# EAGLE board Castle_2_3_2_082224 (EAGLE 9.3.0)
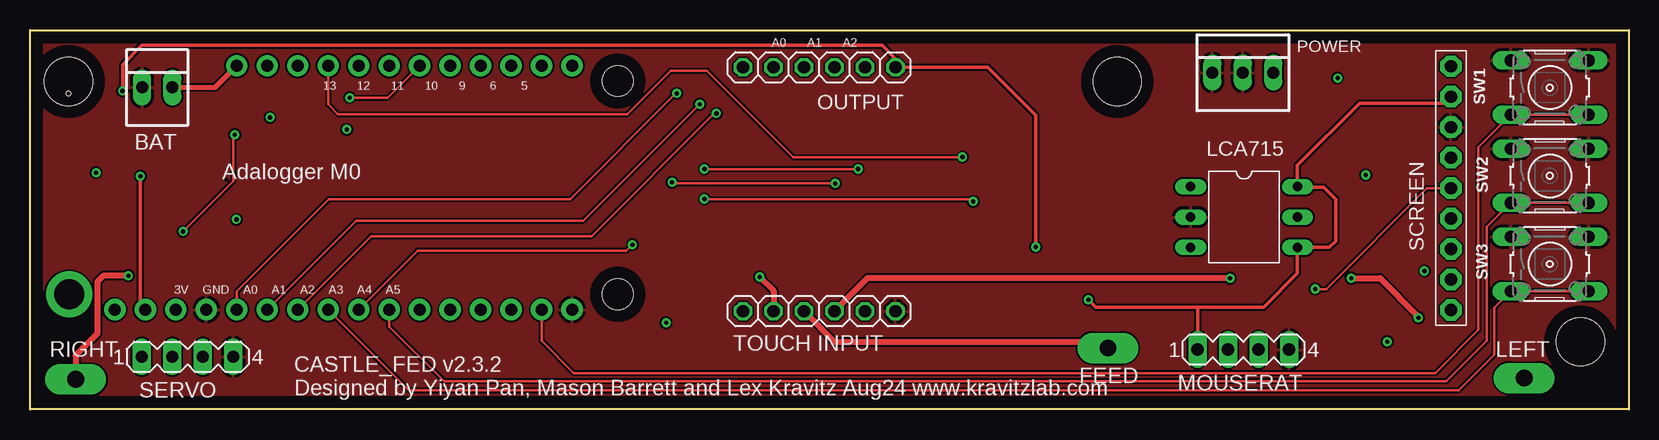
[diagram p0: board, top side]
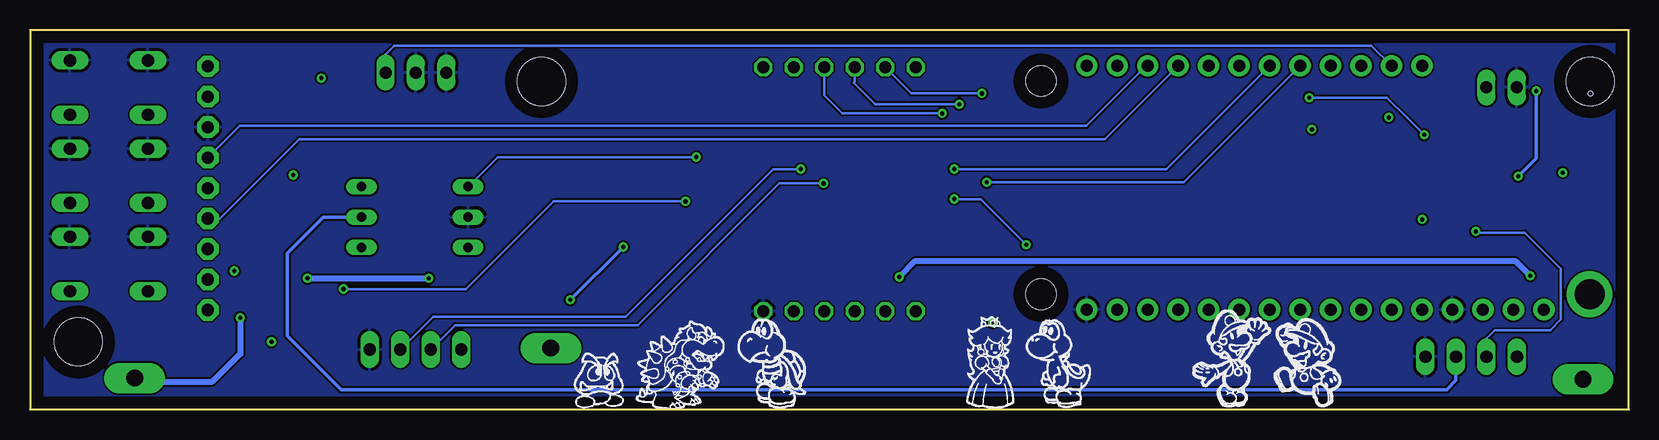
[diagram p1: board, bottom side, seen from below]

Size 133.23 x 31.61 mm. Coordinates in mm from the lower left corner, seen from the top.
Outline: 0,31.61 133.23,31.61 133.23,0 0,0 0,31.61
Copper layers (1*16): Top 0.035mm / dielectric 1.5mm / Bottom 0.035mm
Design rules "default": minimum track width 6mil, minimum drill 0.35mm, track to track 6mil, track to pad 6mil, pad to pad 6mil, via to via 6mil, smd to smd 6mil, copper to edge 40mil, drill to drill 6mil, minimum pad ring 10mil, minimum via ring 8mil, stop-mask expansion 4mil, vias tented up to drill 0mil, thermal gap 10mil
Holes 4 mm at 3.2,27.33 90.6,27.33 129.2,5.63
Holes 0.35 mm at 3.2,26.3

## Footprints (pad centres in the part's own frame; a part is rotated, then mirrored left to right if it is on the bottom)
1X1-BIGPOGO = drill 1.4 pad 2.54 long: P$1 0,0
LCA7XX = drill 0.8 long: P$1 -5.08,2.54; P$2 -5.08,0; P$3 -5.08,-2.54; P$4 3.81,-2.54; P$5 3.81,0; P$6 3.81,2.54
MA04-1 = drill 1.016 long: 1 -3.81,0; 2 -1.27,0; 3 1.27,0; 4 3.81,0
FEATHERWING_DIM = drill 1 pad 1.778: 1 6.35,1.27; 2 8.89,1.27; 3 11.43,1.27; 4 13.97,1.27; 5 16.51,1.27; 6 19.05,1.27; 7 21.59,1.27; 8 24.13,1.27; 9 26.67,1.27; 10 29.21,1.27; 11 31.75,1.27; 12 34.29,1.27; 13 36.83,1.27; 14 39.37,1.27; 15 41.91,1.27; 16 44.45,1.27; 17 44.45,21.59; 18 41.91,21.59; 19 39.37,21.59; 20 36.83,21.59; 21 34.29,21.59; 22 31.75,21.59; 23 29.21,21.59; 24 26.67,21.59; 25 24.13,21.59; 26 21.59,21.59; 27 19.05,21.59; 28 16.51,21.59 | drill 2.5 pad 3.81: P$1 2.54,20.32; P$2 2.54,2.54 | hole 2.54: 48.26,20.32; 48.26,2.54
1X06 = drill 1.016 octagon: 1 -6.35,0; 2 -3.81,0; 3 -1.27,0; 4 1.27,0; 5 3.81,0; 6 6.35,0
22-23-2031 = drill 1 long: 1 -2.54,0; 2 0,0; 3 2.54,0
1X09-BIG = drill 1.016 pad 1.778 octagon: 1 -10.16,0; 2 -7.62,0; 3 -5.08,0; 4 -2.54,0; 5 0,0; 6 2.54,0; 7 5.08,0; 8 7.62,0; 9 10.16,0
B3F-10XX = drill 1.016 long: 1 -3.251,2.261; 2 3.251,2.261; 3 -3.251,-2.261; 4 3.251,-2.261
22-23-2021 = drill 1 long: 1 -1.27,0; 2 1.27,0

## Placement (x,y rotation side)
EXTRAGND  [1X1-BIGPOGO]  124.51,2.61 0 top
EXTRAGND1  [1X1-BIGPOGO]  89.83,5.11 0 top
EXTRAGND2  [1X1-BIGPOGO]  3.81,2.5 0 top
LCA715  LCA715S  [LCA7XX]  101.8,16.03 0 top
MOUSERAT  [MA04-1]  101.1,4.98 0 top
MS2  FEATHERWING_NODIM  [FEATHERWING_DIM]  0.72,7.04 0 top
OUTPUT  [1X06]  65.77,28.5 180 top
POWER  22-23-2031  [22-23-2031]  101.06,28.05 0 top
SCREEN  [1X09-BIG]  118.41,18.43 90 top
SERVO  [MA04-1]  13.13,4.38 0 top
SW1  [B3F-10XX]  126.65,26.81 0 top
SW2  [B3F-10XX]  126.65,19.46 0 top
SW3  [B3F-10XX]  126.65,12.11 0 top
TOUCH_INPUT  [1X06]  65.77,8.18 180 top
X1  22-23-2021  [22-23-2021]  10.6,26.83 0 top

## Library data of the parts
EXTRAGND EXTRAGND1 EXTRAGND2 MS2 OUTPUT SCREEN TOUCH_INPUT = adafruit
LCA715 = Mohamed's-library
MOUSERAT SERVO = con-lstb; OC_FARNELL: unknown; OC_NEWARK: unknown
POWER = con-molex; MF: MOLEX; MPN: 22-23-2031; OC_FARNELL: 1462950; OC_NEWARK: 30C0862
SW1-SW3 = buttons
X1 = con-molex; MF: MOLEX; MPN: 22-23-2021; OC_FARNELL: 1462926; OC_NEWARK: 25C3832

## Nets
0: MS2.14
1: MS2.15 SW1.3 SW1.4
3V: LCA715.P$4 LCA715.P$6 MOUSERAT.1 MS2.2 OUTPUT.1 SCREEN.8
5: MS2.19 SCREEN.6
6: MS2.20 SCREEN.4
10: MS2.22 SERVO.2
11: MOUSERAT.3 MS2.23
12: MOUSERAT.2 MS2.24
13: LCA715.P$1 MS2.25
A0: MS2.5 OUTPUT.5
A1: MS2.6 OUTPUT.4
A2: MS2.7 OUTPUT.3
A3: MS2.8 SW3.3 SW3.4
A4: MS2.9 SCREEN.5
A5: MS2.10 SW2.3 SW2.4
EN: MS2.27 POWER.3
GND: LCA715.P$2 MOUSERAT.4 MS2.4 MS2.16 POWER.1 POWER.2 SCREEN.7 SERVO.4 SW1.1 SW1.2 SW2.1 SW2.2 SW3.1 SW3.2 TOUCH_INPUT.1 X1.1
RESET: MS2.1
SERVO_POWER: LCA715.P$5 SERVO.3
TOUCH1: EXTRAGND.P$1 TOUCH_INPUT.3
TOUCH2: EXTRAGND1.P$1 TOUCH_INPUT.4
TOUCH3: EXTRAGND2.P$1 TOUCH_INPUT.5
VBAT: MS2.28 X1.2

## Tracks (layer width: path | path; a pad name or v marks a point on that pad's centre or on a via)
1
  Top 0.203: SW1.4 SW1.3 120.7,21.86 120.7,6.63 117.1,3.03 45.3,3.03 42.63,5.7 MS2.15
3V  (via drill 0.35)
  Top 0.305: SCREEN.8 117.88,25.53 110.8,25.53 105.61,20.34 LCA715.P$6 105.65,18.53 107.8,18.53 108.8,17.53 108.8,14.03 108.26,13.49 LCA715.P$4 105.61,11.34 102.8,8.53 97.29,8.53 | 97.29,8.53 MOUSERAT.1 | v7.71,26.53 7.71,28.73 9.3,30.33 71,30.33 72.3,29.03 72.3,28.03 72.12,28.21 OUTPUT.1 79.78,28.5 79.8,28.53 83.8,24.53 v83.8,13.53 | 97.29,8.53 88.8,8.53 v88.2,9.13 | v9.2,19.43 9.2,8.72 MS2.2
  Bottom 0.305: v9.2,19.43 9.2,19.44 7.71,20.93 v7.71,26.53 | v88.2,9.13 v83.8,13.53
5
  Bottom 0.203: SCREEN.6 115.76,23.63 45.2,23.63 40.19,28.64 MS2.19
6
  Bottom 0.203: MS2.20 43.66,22.53 110.8,22.53 117.43,15.89 SCREEN.4
10  (via drill 0.35)
  Top 0.2: v26.63,25.97 29.81,25.97 MS2.22
  Top 0.203: v12.75,14.83 16.95,19.03 16.95,22.78 v17.05,22.88
  Bottom 0.2: 18.45,24.28 20.15,25.97 v26.63,25.97
  Bottom 0.203: v17.05,22.88 18.45,24.28 | v12.75,14.83 12.75,14.73 8.65,14.73 5.65,11.73 5.65,7.49 6.56,6.58 11.16,6.58 11.86,5.88 SERVO.2
11  (via drill 0.35)
  Top 0.203: v69,20.03 v56.2,20.03
  Bottom 0.2: MS2.23 38.54,20.03 v56.2,20.03
  Bottom 0.203: MOUSERAT.3 99.63,7.73 83.6,7.73 71.3,20.03 v69,20.03
12  (via drill 0.35)
  Top 0.203: v53.5,18.93 53.6,18.83 v67.1,18.83
  Bottom 0.2: MS2.24 37.1,18.93 v53.5,18.93
  Bottom 0.203: MOUSERAT.2 97.79,7.03 82.6,7.03 70.8,18.83 v67.1,18.83
13  (via drill 0.35)
  Top 0.203: MS2.25 24.85,25.41 25.66,24.6 49.76,24.6 53.38,28.23 56.4,28.23 63.6,21.03 v77.7,21.03
  Bottom 0.203: v77.7,21.03 94.26,21.03 LCA715.P$1
A0  (via drill 0.35)
  Top 0.203: v53.9,26.33 53.8,26.33 45,17.53 24.9,17.53 17.23,9.85 MS2.5
  Bottom 0.203: OUTPUT.5 59.78,26.33 v53.9,26.33
A1  (via drill 0.35)
  Top 0.203: MS2.6 27.18,15.73 46.1,15.73 v55.8,25.43
  Bottom 0.203: v55.8,25.43 62.8,25.43 64.6,27.23 64.5,27.33 OUTPUT.4
A2  (via drill 0.35)
  Top 0.203: MS2.7 28.42,14.43 46.8,14.43 57.03,24.66 v57.2,24.66
  Bottom 0.203: v57.2,24.66 65.53,24.66 67.04,26.16 OUTPUT.3
A3
  Top 0.203: SW3.4 SW3.3 122,8.45 122,4.55 119.05,1.59 31.57,1.59 MS2.8
A4  (via drill 0.35)
  Top 0.203: MS2.9 32.3,13.23 49.7,13.23 v50.2,13.73 | v56.2,17.53 78.4,17.53 v78.6,17.33 | v107.1,10.03 108,10.03 116.41,18.43 SCREEN.5
  Bottom 0.203: v78.6,17.33 89.6,17.33 96.9,10.03 v107.1,10.03 | v56.2,17.53 54,17.53 v50.2,13.73
A5
  Top 0.203: SW2.4 SW2.3 121.4,15.2 121.4,5.73 118,2.33 34.5,2.33 29.93,6.9 MS2.10
EN
  Bottom 0.2: MS2.27 21.45,30.32 102.9,30.32 103.6,29.61 POWER.3
GND
  pour Top: -2,42.06 144.98,42.06 144.98,-0.84 -2,-0.84
  pour Bottom: -2.75,41.05 153.12,41.05 153.12,-0.66 -2.75,-0.66
N$1  (via drill 0.35)
  other vias: 20,24.33
N$2  (via drill 0.35)
  other vias: 5.5,19.73
N$3  (via drill 0.35)
  other vias: 17.2,15.83
N$5  (via drill 0.35)
  other vias: 111.3,19.53
N$6  (via drill 0.35)
  other vias: 116.2,11.53
N$7  (via drill 0.35)
  other vias: 108.97,27.6
N$9  (via drill 0.35)
  other vias: 53.01,7.21
N$10  (via drill 0.35)
  other vias: 26.4,23.33
N$11  (via drill 0.35)
  other vias: 113.1,5.63
SERVO_POWER
  Bottom 0.305: LCA715.P$5 108.8,16.03 111.8,13.03 111.8,6.14 107.3,1.64 15.18,1.64 14.4,2.43 SERVO.3
TOUCH1  (via drill 0.35)
  Top 0.508: TOUCH_INPUT.3 69.78,10.93 v100,10.93 | v110.1,10.93 112.5,10.93 115.7,7.73 v115.7,7.63
  Bottom 0.152: 124.21,2.3 EXTRAGND.P$1
  Bottom 0.508: v110.1,10.93 v100,10.93 | v115.7,7.63 115.7,4.63 118.02,2.3 124.21,2.3
TOUCH2
  Top 0.508: EXTRAGND1.P$1 89.33,5.61 67.07,5.61 TOUCH_INPUT.4
TOUCH3  (via drill 0.35)
  Top 0.508: v8.2,11.13 6.1,11.13 5.61,10.63 5.61,6.3 3.81,4.5 EXTRAGND2.P$1 | v60.8,11.03 61.96,9.87 TOUCH_INPUT.5
  Bottom 0.508: v8.2,11.13 9.4,12.33 59.5,12.33 v60.8,11.03
VBAT
  Top 0.406: X1.2 15.42,26.83 MS2.28

## Text on the board
Top: BAT
tNames: A0 A1 A2 | 13 12 11 10 9 6 5 | BAT | Adalogger M0 | 3V GND A0 A1 A2 A3 A4 A5 | TOUCH INPUT | RIGHT | LEFT | FEED | MOUSERAT | SERVO | CASTLE_FED v2.3.2 / Designed by Yiyan Pan, Mason Barrett and Lex Kravitz Aug24 www.kravitzlab.com